# Altium PCB Drive-It_pcb.PcbDoc
Units mil, origin at the board's own origin, x right, y up, seen from the top; angles counter-clockwise.
Board outline 19800 x 8970 mil, 2 copper layers (Top Layer, Bottom Layer); 25 components, 36 nets, 120 pads, 0 vias.
Unrouted connection lines stored in the file: 64.
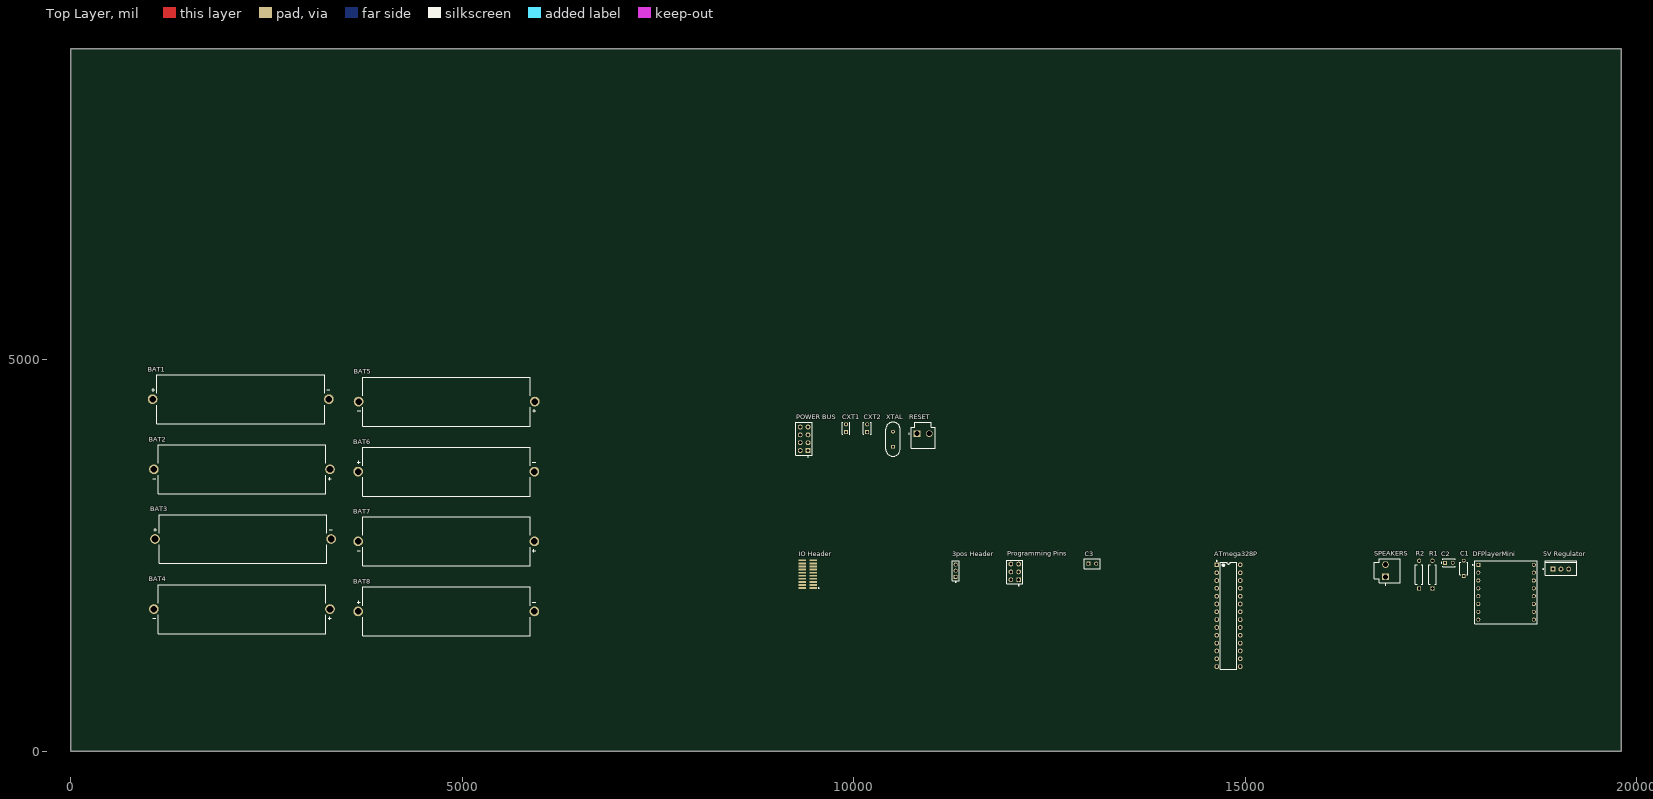
[diagram p0: Top Layer view]
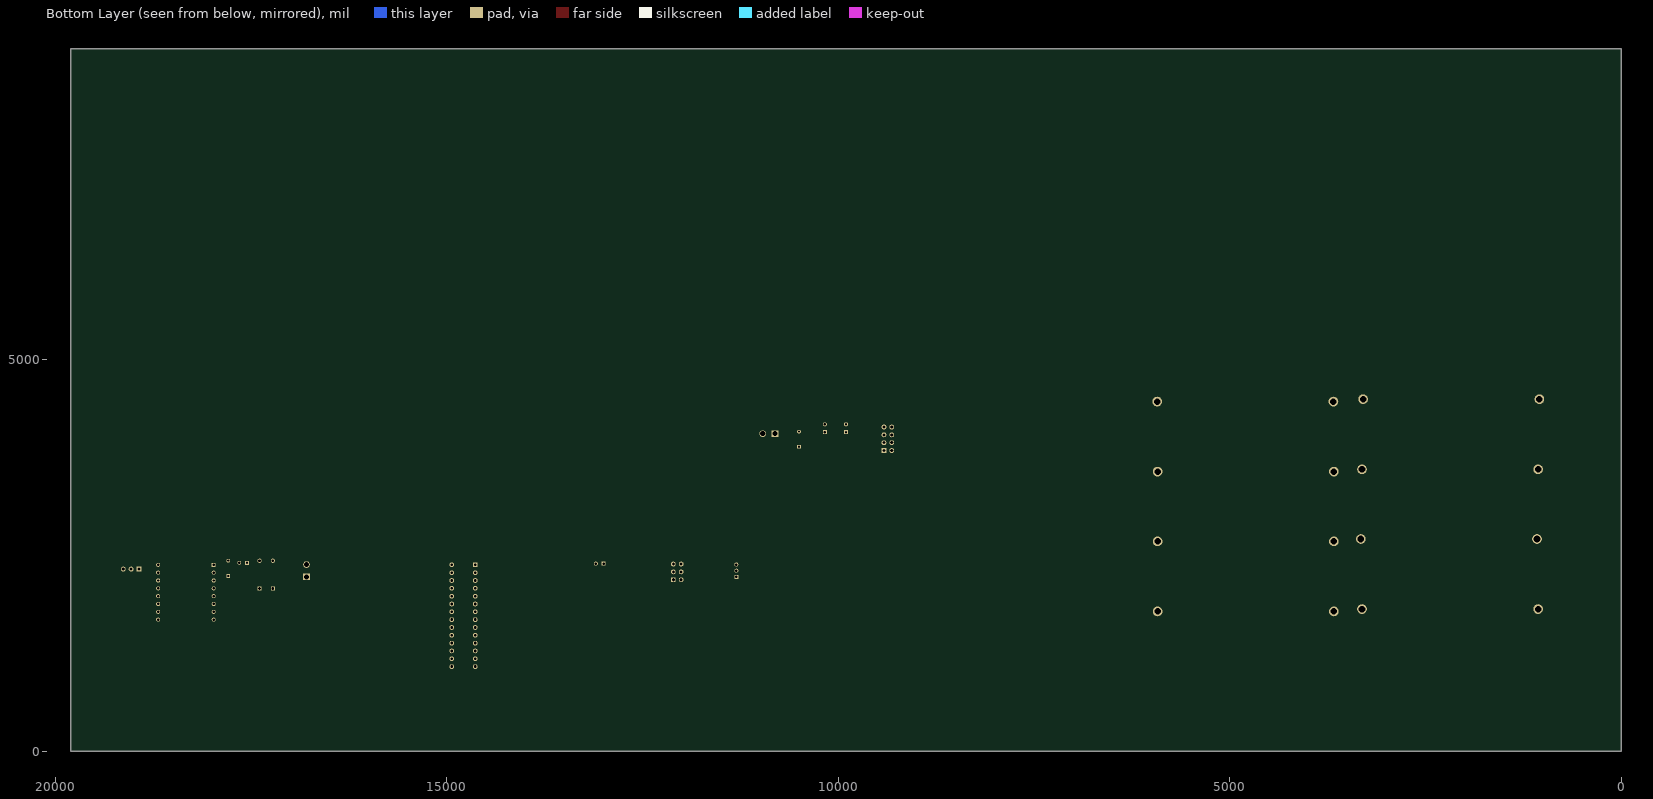
[diagram p1: Bottom Layer view, seen from below]

## Layer stack, top to bottom
Top Solder: solder mask 0.4, Solder Resist, Dk 3.5
Top Layer: signal copper 1.4
Dielectric 1: dielectric 12.6, FR-4, Dk 4.8
Bottom Layer: signal copper 1.4
Bottom Solder: solder mask 0.4, Solder Resist, Dk 3.5

## Board outline
0,0 19800,0 19800,8970 0,8970

## Design rules (kind name [scope] priority, off if disabled: settings)
Clearance [All] p1: gap=10 ignorepadtopadclearanceinfootprint=FALSE except(0: Arc-Hole Track-Hole SMDPad-Hole THPad-Hole Via-Hole Fill-Hole Poly-Hole Region-Hole Text-Hole)
PolygonConnect [All] p1: connectstyle=Relief reliefconductorwidth=10 reliefentries=4 polygonreliefangle="90 Angle" airgapwidth=10
RoutingVias [All] p1: holewidth=28 width=50 viastyle="Through Hole" minholewidth=28 minwidth=50 maxholewidth=28 maxwidth=50
SolderMaskExpansion [All] p1: expansion=4 istentingtop=FALSE
Width [All] p1: maxlimit=10 minlimit=10 preferedwidth=10
30 further rules are at their usual default settings.

## Components (designator, comment, footprint, x,y, rotation, side; value= is the part's Value field where it differs from the comment)
"3pos Header" "" FP-NRPN031PAEN-RC-MFG 11300,2305 r90 top
"5V Regulator" "LM7805" FAIR-TO-220-3 19030,2325 r90 top
ATmega328P "" ATML-28P3 14785,1730 r0 top
BAT1 "" BAT_2222 2170,4495 r0 top
BAT2 "" BAT_2222 2185,3600 r180 top
BAT3 "" BAT_2222 2200,2710 r0 top
BAT4 "" BAT_2222 2185,1815 r180 top
BAT5 "" BAT_2222 4800,4465 r180 top
BAT6 "" BAT_2222 4795,3570 r0 top
BAT7 "" BAT_2222 4795,2680 r180 top
BAT8 "" BAT_2222 4795,1785 r0 top
C1 "0.22uF" FP-RCE1K1-2_5-MFG 17790,2335 r90 top
C2 "0.1uF" VISH-K104K15X7RF5TL2 17600,2405 r0 top
C3 "C320C104K5R5TA" CAPR51-254-508X318X736 13045,2395 r0 top value=100nF
CXT1 "22pF" KEMT-C315-THT-2 9900,4125 r90 top
CXT2 "22pF" KEMT-C315-THT-2 10170,4125 r90 top
DFPlayerMini "" MODULE_DFR0299 18330,2030 r0 top
"IO Header" "" SMTC-MW-10-03-G-D-245-065-P_V 9410,2260 r90 top
"POWER BUS" "POWER BUS" FP-M20-9980446-MFG 9365,3990 r90 top
"Programming Pins" "" SMTC-TSW-103-07-G-D_V 12055,2290 r90 top
R1 "MFR-25FBF52-1K" RESA60-630X240 17390,2255 r90 top value=680
R2 "MFR-25FBF52-1K" RESA60-630X240 17220,2255 r90 top value=1k
RESET "" JST-B2P-VH(LF)(SN)_V 10885,4000 r0 top
SPEAKERS "" JST-B2P-VH(LF)(SN)_V 16845,2305 r90 top
XTAL "16MHz" JPY-49S-18PF 10500,3985 r90 top

## Footprints (in the part's own frame and the unit in brackets; to place one, negate y for a bottom-side part, rotate by r counter-clockwise, add the part's x,y. Pads: shape width x height; smd on the part's side, far side on the other; paste and mask are expansions set on the pad)
ATML-28P3 [mm] "DIP, 28-Leads, Body 34.8x7.2mm, Pitch 2.54mm"
  rect 1.5x1.5 hole 0.9: 1(-3.81,16.51)
  round 1.5 hole 0.9: 2(-3.81,13.97) 3(-3.81,11.43) 4(-3.81,8.89) 5(-3.81,6.35) 6(-3.81,3.81) 7(-3.81,1.27) 8(-3.81,-1.27) 9(-3.81,-3.81) 10(-3.81,-6.35) 11(-3.81,-8.89) 12(-3.81,-11.43) 13(-3.81,-13.97) 14(-3.81,-16.51) 15(3.81,-16.51) 16(3.81,-13.97) 17(3.81,-11.43) 18(3.81,-8.89) 19(3.81,-6.35) 20(3.81,-3.81) 21(3.81,-1.27) 22(3.81,1.27) 23(3.81,3.81) 24(3.81,6.35) 25(3.81,8.89) 26(3.81,11.43) 27(3.81,13.97) 28(3.81,16.51)
  silkscreen extent -3.93,-17.4 2.65,17.93, body extent -3.95,-17.4 3.95,17.4, height 4.58
BAT_2222 [mm]
  round 3.146 hole 2.13: N(28.575,0) P(-28.575,0)
  silkscreen extent -28.94,-7.94 28.94,7.94
CAPR51-254-508X318X736 [mm] "THD, 2-Leads, Body 5.08x3.18mm"
  rect 1.3x1.3 hole 0.8: 1(-1.27,0)
  round 1.3 hole 0.8: 2(1.27,0)
  silkscreen extent -2.54,-1.59 2.54,1.59, body extent -2.54,-1.59 2.54,1.59, height 7.36
FAIR-TO-220-3 [mm] "FM, 3-Leads, Body 10.2x4.7mm, Pitch 2.54mm"
  rect 1.6x1.6 hole 1: 1(0,2.54)
  round 1.6 hole 1: 2(0,0) 3(0,-2.54)
  silkscreen extent -2.04,-5.1 2.66,5.87, body extent -2.04,-5.1 2.66,5.1, height 18.95
FP-M20-9980446-MFG [mm]
  rect 1.57x1.57 hole 1.02 paste-2539.97 mask+0: 1(-3.81,-1.27)
  round 1.57 hole 1.02 paste-2539.97 mask+0: 2(-3.81,1.27) 3(-1.27,-1.27) 4(-1.27,1.27) 5(1.27,-1.27) 6(1.27,1.27) 7(3.81,-1.27) 8(3.81,1.27)
  silkscreen extent -6.05,-2.64 5.33,2.64, body extent -5.43,-2.74 5.43,2.74, height 0.25
FP-NRPN031PAEN-RC-MFG [mm]
  rect 1.3x1.3 hole 0.8 paste-2539.97 mask+0: 1(-2,0)
  round 1.3 hole 0.8 paste-2539.97 mask+0: 2(0,0) 3(2,0)
  silkscreen extent -3.8,-1.1 3.25,1.1, body extent -3.35,-1.2 3.35,1.2, height 0.25
FP-RCE1K1-2_5-MFG [mm]
  rect 1.2x1.2 hole 0.7 paste-2539.97 mask+0: 1(-2.5,0)
  round 1.2 hole 0.7 paste-2539.97 mask+0: 2(2.5,0)
  silkscreen extent -2,-1.25 2,1.25, body extent -3.2,-1.35 3.2,1.35, height 0.25
JPY-49S-18PF [mm] "THD, 2-Leads, Body 11.05x4.65mm, Pitch 4.88mm"
  rect 1.2x1.2 hole 0.7: 1(-2.44,0)
  round 1.2 hole 0.7: 2(2.44,0)
  silkscreen extent -5.53,-2.32 5.53,2.32, body extent -5.52,-2.32 5.53,2.33, height 3.5
JST-B2P-VH(LF)(SN)_V [mm] "THD, 2-Leads, Body 8.5x7.86mm, Pitch 3.96mm"
  rect 2.15x2.15 hole 1.65: 1(-1.98,1.4)
  round 2.15 hole 1.65: 2(1.98,1.4)
  silkscreen extent -4.7,-3.4 3.93,5.1, body extent -3.93,-3.2 3.93,5.3, height 10.9
KEMT-C315-THT-2 [mm] "THD, 2-Leads, Body 3.81x2.54mm"
  rect 1.3x1.3 hole 0.8: 1(-1.27,0)
  round 1.3 hole 0.8: 2(1.27,0)
  silkscreen extent -1.91,-1.27 1.91,1.27, body extent -1.91,-1.27 1.91,1.27, height 4.66
MODULE_DFR0299 [mil]
  rect 51.5x51.5 hole 31.5: 1(-355,350)
  round 51.5 hole 31.5: 2(-355,250) 3(-355,150) 4(-355,50) 5(-355,-50) 6(-355,-150) 7(-355,-250) 8(-355,-350) 9(355,-350) 10(355,-250) 11(355,-150) 12(355,-50) 13(355,50) 14(355,150) 15(355,250) 16(355,350)
  silkscreen extent -429,-400 400,400
RESA60-630X240 [mm] "Axial Resistor, 2-Leads, Dia 2.4mm, Body Length 6.3mm"
  rect 1.35x1.35 hole 0.85: 1(-4.5,0)
  round 1.35 hole 0.85: 2(4.5,0)
  silkscreen extent -3.15,-1.2 3.15,1.2, body extent -4.77,-1.19 4.77,1.2, height 2.4
SMTC-MW-10-03-G-D-245-065-P_V [mm] "CONN, 20-Leads, Body 3.18x10mm, Pitch 1mm"
  rect 0.56x2.41 smd: 1(-4.5,-1.78) 2(-4.5,1.78) 3(-3.5,-1.78) 4(-3.5,1.78) 5(-2.5,-1.78) 6(-2.5,1.78) 7(-1.5,-1.78) 8(-1.5,1.78) 9(-0.5,-1.78) 10(-0.5,1.78) 11(0.5,-1.78) 12(0.5,1.78) 13(1.5,-1.78) 14(1.5,1.78) 15(2.5,-1.78) 16(2.5,1.78) 17(3.5,-1.78) 18(3.5,1.78) 19(4.5,-1.78) 20(4.5,1.78)
  silkscreen extent -4.63,-3.69 -4.37,-3.44, body extent -5,-2.6 5,2.6, height 9.39
SMTC-TSW-103-07-G-D_V [mm] "THD, 6-Leads, Body 7.62x5.08mm, Pitch 2.54mm"
  rect 1.55x1.55 hole 1.02: 1(-2.54,-1.27)
  round 1.55 hole 1.02: 2(-2.54,1.27) 3(0,-1.27) 4(0,1.27) 5(2.54,-1.27) 6(2.54,1.27)
  silkscreen extent -4.58,-2.54 3.81,2.54, body extent -3.81,-2.54 3.81,2.54, height 8.38
VISH-K104K15X7RF5TL2 [mm] "THD, 2-Leads, Body 4x2.6mm"
  rect 1.25x1.25 hole 0.75: 1(-1.25,0)
  round 1.25 hole 0.75: 2(1.25,0)
  silkscreen extent -2.55,-1.3 2,1.3, body extent -2,-1.3 2,1.3, height 5.6

## Part data
"3pos Header": library part CMP-25680-000021-1, "CONN HEADER VERT 3POS 2MM", Current Rating=2A, Manufacturer=Sullins, Manufacturer Part Number=NRPN031PAEN-RC, Package=0, Temperature="-40°C to +105°C", Temperature Range High=+105°C, Temperature Range Low=-40°C, Voltage Rating=150V, Automotive=No, Category=Conn, ComponentLink2Description=Datasheet, ComponentLink2URL=https://drawings-pdf.s3.amazonaws.com/10531.pdf, Conn Gender=Male, Conn Orientation=Straight, Contact Material=Gold,Nickel, Device Class L1=Connectors, Device Class L2="Headers and Wire Housings", Device Class L3=unset, Digikey Description="CONN HEADER VERT 3POS 2MM", Height=6mm, Lead Free=Yes, Number Of Contacts=3, Number Of Rows=1, Octopart=https://octopart.com/nrpn031paen-rc-sullins-12817732, Pitch=2mm, RoHS=TRUE
"5V Regulator": library part CMP-2000-04938-1, "Positive Voltage Regulator, 5 V, 1 A, -40 to 125 degC, 3-Pin TO-220, RoHS, Tube", Manufacturer=FairchildSemiconductor, Maximum Input Voltage=35V, Maximum Output Current=2.2(Typ)A, Maximum Quiescent Current=8mA, Operating Temperature=-40to125degC, Output Voltage=5V, Package=3TO-220AB, Package Description="3-Pin Through Hole Device, Body 10 x 4.5 mm, Pitch 2.54 mm", Package Reference=TO-220, Typical Dropout Voltage @ Current=2@1AV, Accuracy=±4%, Category=LinearRegulator, Datasheet URL=https://datasheet.ciiva.com/26904/lm7805ct-26904988.pdf, Datasheet Version=Aug-12, Line Regulation=100mV, Load Regulation=100mV, Manufacturer URL=https://www.fairchildsemi.com/, Mounting=ThroughHole, Number of Outputs=1, Output Type=Fixed, Package URL=https://www.fairchildsemi.com/package-drawings/TO/TO220B03.pdf, Packaging=Rail/Tube, Polarity=Positive, Rad Hard=No, Type=Linear
ATmega328P: library part CMP-020-00004-3, "8-Bit Microcontroller with 32 KBytes In-System Programmable Flash, 23 I/Os, -40 to 85 degC, 28-Pin PDIP (28P3), RoHS, Tube", Case/Package=DIP, Manufacturer=Atmel, Max Clock Frequency=20MHz, Max Operating Temperature=85°C, Max Supply Voltage=5.5V, Min Operating Temperature=-40°C, Min Supply Voltage=1.8V, Package Description="28-Pin Plastic Dual Inline Package, Body 34.671 x 7.3025 mm, Pitch 2.54 mm", Package Quantity=14, Package Reference=28P3, Package Version="Rev. B, 09/2001", Datasheet URL=http://www.atmel.com/images/Atmel-8271-8-bit-AVR-Microcontroller-ATmega48A-48PA-88A-88PA-168A-168PA-328-328P_datasheet_Complete.pdf, Datasheet Version="Rev. 8271J, 11/2015", Density=32KB, Ethernet Channels=0, I/Os=23, Interface=USART, Manufacturer URL=http://www.atmel.com/, Mounting Technology=TH, Package URL=http://www.atmel.com/images/Atmel-8271-8-bit-AVR-Microcontroller-ATmega48A-48PA-88A-88PA-168A-168PA-328-328P_datasheet_Complete.pdf, Packaging=Rail/Tube, Pins=28, RAM Size=2KB, RoHS Compliant=True
BAT1 BAT2 BAT3 BAT4 BAT5 BAT6 BAT7 BAT8: library part CMP-018-000001-4, "Keystone Electronics single AA battery connector", Package=None, Availability=Unavailable, Component Type=Standard, Connector Type="PC Pin", Design Item ID=2222, Mounting Technology=through-hole, MP=2222, Pin Count=2, Price=None, Source=2222.SchLib
C1: library part CMP-06035-033138-1, "Cap Ceramic Monolithic 220nF 50V 10% Thru-Hole Bulk", Capacitance=220nF, Case/Package=Radial, Dielectric=X7R, Max Operating Temperature=125°C, Min Operating Temperature=-55°C, Package Quantity=500, Ratings=AEC-Q200, Resistor Type=Ceramic, Tolerance=10%, Voltage Rating=50V, Height=3.5mm, Height - Seated (Max)=0.138inch, Lead Diameter=0.5mm, Lead Pitch=0.197inch, Lead/Base Style="Formed Leads", Length=0.157inch, Mount="Through Hole", Packaging=Bulk, Termination=Radial, Voltage Rating (DC)=50V, Width=0.098inch
C2: library part CMP-2000-06508-1, "Ceramic Capacitor, 100 nF, +/- 10%, 50 V, -55 to 125 degC, 2-Pin THD, RoHS, Tape and Reel", Capacitance=0.1µF, Manufacturer=Vishay, Operating Temperature=-55°C~125°C, Package / Case=Radial, Package Description="2-Pin Through Hole Device, Body 4 x 2.6 mm", Package Reference=K104K15X7RF5TL2, Ratings=-, Standard Package=1, Temperature Coefficient=X7R, Tolerance=±10%, Voltage - Rated=50V, Applications=GeneralPurpose, Catalog Drawings=Mono-KapSide2-15_5.58Mono-KapSide1_15, Category=Capacitors, Datasheet URL=http://www.vishay.com/docs/45171/kseries.pdf, Datasheet Version=08/2013, Family=CeramicCapacitors, Features=-, Height - Seated (Max)="0.220\"(5.58mm)", Lead Spacing="0.098\"(2.50mm)", Lead Style=Straight, Manufacturer URL=http://www.vishay.com/, Mounting Technology=ThroughHole, Mounting Type=ThroughHole, Online Catalog=Mono-Kap™Series, Other Names=BC1084CT, Packaging=CutTape(CT), Series=Mono-Kap™K, Size / Dimension="0.157\"Lx0.098\"W(4.00mmx2.50mm)", Thickness (Max)=-
C3: library part CMP-001-00088-1, "Ceramic Capacitor, Multilayer, Ceramic, 50V, 10% +Tol, 10% -Tol, X7R, 15% TC, 0.1uF, Through Hole Mount", Capacitor Type=Ceramic, Max Operating Temperature=125°C, Min Operating Temperature=-55°C, Tolerance=10%, Voltage Rating=50V, Mounting Technology="Through Hole", Pins=2, RoHS Compliant=Yes
CXT1 CXT2: library part CMP-1664-00008-1, "Capacitor, Ceramic, 22 pF, +/-10 %, 100 V, -55 to 125 degC, 2-Pin THD, RoHS, Bulk", Case\Package=TO-220, Max Input Voltage="40 V", Max Operating Temperature="125 degC", Max Ouput Current="1.5 A", Min Input Voltage="4.2 V", Min Operating Temperature="0 degC", Output Voltage="1.2 V", Package Quantity=50, ComponentLink1Description="Manufacturer URL", ComponentLink1URL=http://www.kemet.com/, ComponentLink2Description=Datasheet, ComponentLink2URL=http://capacitoredge.kemet.com/capedge2/DataSheet/Datasheet-C315C220K1G5TA.pdf?pn=C315C220K1G5TA{BULK}, DatasheetVersion=Aug-16, Height="9.28 mm", Length="10.28 mm", Mount="Through Hole", Output Current="1.5 A", Outputs=1, PackageDescription="2-Pin Through Hole Device, Body 3.81 x 2.54 mm", PackageReference=C315-THT-2, Packaging=Rail/Tube, Pins=3, Radiation Hardening=No, REACH SVHC="No SVHC", RoHSCompliant=true, Weight="0.08113 oz", Width="4.82 mm"
DFPlayerMini: library part DFR0299, "Dfplayer - a Mini Mp3 Player", Package=None, Availability=Unavailable, MP=DFR0299, Price=None
"IO Header": library part CMP-002-00046-2, "Flexible Micro Board Stacker, Pitch 1 mm, 2 x 10 Position, Height 9.4 mm, -55 to 125 degC, RoHS, Tape and Reel", Case/Package=MW-10-03-G-D-245-065-P, Manufacturer=Samtec, Max Operating Temperature=125°C, Min Operating Temperature=-55°C, Package Description="Flexible Micro Board Stacker, Pitch 1 mm, 2 x 10 Position, Height 9.4 mm", Connector Type=Header, Datasheet URL=http://suddendocs.samtec.com/prints/mw-xx-03-x-d-xxx-xxx-xx-mkt.pdf, Datasheet Version=34759, Gender=Male, Manufacturer URL=https://www.samtec.com/, Mounting Technology=SM, Package Reference=MW-10-03-G-D-245-065-P, Packaging=TapeandReel, Pins=20, RoHS Compliant=True
"POWER BUS": library part CMP-15831-000088-1, "CONN HEADER VERT 8POS 2.54MM", Color=Black, Contact Resistance=30mR, Current Rating=3A, Flammability Rating="UL94 V-0", Insulation Resistance=10GR, Max Operating Temperature=105°C, Min Operating Temperature=-40°C, Package Quantity=1000, Connector Type="Male Pin", Contact Finish - Mating=TIN, Contact Material=Brass, Contact Mating Length=0.24inch, Contact Plating=Tin, Contact Shape=Square, Contact Type="Male Pin", Depth=5.08mm, Fastening Type=Pull, Gender=Male, Housing Color=Black, Housing Material=Nylon, Insulation Color=Black, Insulation Material=Nylon, Length=10.16mm, Mated Stacking Heights=16.54mm, Max Current Rating=3A, Mount="Through Hole", Number Of Contacts=8, Number of Positions=8, Number Of Rows=2, Orientation=Straight, Packaging=Bulk, Pitch=2.54mm, Radiation Hardening=No, REACH SVHC="No SVHC", RoHS Compliant=Yes, Row Spacing=0.1inch, Series=M20, Termination=Solder
"Programming Pins": library part CMP-2000-07329-1, "Through Hole Header, Pitch 2.54 mm, 2 x 3 Position, Height 8.58 mm, Tail Length 2.54 mm, -55 to 125 degC, RoHS, Bulk", Color=Black, Manufacturer=Samtec-Inc., Package Description="Through Hole Header, Pitch 2.54 mm, 2 x 3 Position, Height 8.58 mm, Tail Length 2.54 mm", Package Reference=TSW-103-07-G-D, Category=Connectors,Interconnects, Connector Type=Header,Unshrouded, Contact Finish=Gold, Contact Finish Thickness=10µin(0.25µm), Contact Mating Length="0.230\"(5.84mm)", Contact Type=MalePin, Datasheet URL=http://suddendocs.samtec.com/catalog_english/tsw_th.pdf, Datasheet Version=12/2015, Family=RectangularConnectors-Headers,MalePins, Fastening Type=-, Features=-, Manufacturer URL=http://www.samtec.com/, Mounting Technology=ThroughHole, Mounting Type=ThroughHole, Number of Positions=6, Number of Positions Loaded=All, Number Of Rows=2, Package URL=http://suddendocs.samtec.com/prints/tsw-xxx-xx-xxx-x-xx-xxx-mkt.pdf, Packaging=Bulk, Pitch="0.100\"(2.54mm)", Row Spacing="0.100\"(2.54mm)", Series=TSW, Termination=Solder
R1 R2: library part CMP-009-00048-4, "Axial Resistor, 1 KOhm, +/- 1%, 250 mW, -55 to 155 degC, 2-Pin THD, RoHS, Bulk", Case/Package=Axial, Manufacturer=Yageo, Max Operating Temperature=155°C, Min Operating Temperature=-55°C, Package Description="2-Pin Axial Lead, Dia 2.4 mm, Body Length 6.3 mm", Package Quantity=200, Package Reference=MFR-25, Power=250mW, Tolerance=1%, Voltage Rating=250V, Composition=CarbonFilm, Datasheet URL=http://www.yageo.com/documents/recent/Yageo%20LR_MFR_2013.pdf, Datasheet Version=Apr-13, Manufacturer URL=http://www.yageo.com/, Mounting Technology=TH, Packaging=Bulk, RoHS Compliant=True
RESET SPEAKERS: library part CMP-002-00025-2, "Male Header, Pitch 3.96 mm, 1 x 2 Position, Height 10.9 mm, Tail Length 3.7 mm, -25 to 85 degC, RoHS, Bulk", Case/Package=B2P-VH(LF)(SN), Manufacturer=JST, Max Operating Temperature=85°C, Min Operating Temperature=-25°C, Package Description="Male Header, Pitch 3.96 mm, 1 x 2 Position, Height 10.9 mm, Tail Length 3.7 mm", Connector Type=Header, Datasheet URL=http://www.jst-mfg.com/product/pdf/eng/eVH.pdf, Datasheet Version=May-16, Gender=Male, Manufacturer URL=http://www.jst.com/home2.html, Mounting Technology=TH, Package Reference=B2P-VH(LF)(SN), RoHS Compliant=Unknown
XTAL: library part CMP-003-00000-2, "Crystal, 16 MHz, +/-20 ppm, 18 pF, -20 to 70 degC, 2-Pin THD, RoHS", Case/Package=49S-18PF, Manufacturer="Shenzhen Jingpengyuan", Package Description="2-Pin Through Hole Device, Body 11.05 x 4.65 mm, Pitch 4.88 mm", Datasheet URL=http://datasheet.octopart.com/49S-18PF-Xinhunjing-datasheet-30677139.pdf, Datasheet Version=Aug-14, Frequency=16MHz, Manufacturer URL=http://www.chjiahui.com/, Mounting Technology=TH, Package Reference=49S-18PF, RoHS Compliant=Unknown

## Nets (pads, with @x,y where several pads share a name; then routed paths per layer and width w, separated by ;. In a path a pad name is that pad's centre, name@x,y a point inside that pad or via, vN(x,y) a via of type N, cw(c..) or ccw(c..) an arc to the next point about the centre after c; other vN are vias at no path point)
GND: "5V Regulator.2" "POWER BUS.5" "POWER BUS.7" "Programming Pins.5" ATmega328P.8 ATmega328P.22 BAT4.N BAT8.N C1.2 C2.1 C3.1 DFPlayerMini.7 DFPlayerMini.10 R2.1
"Net3pos Header_2": "3pos Header.2" ATmega328P.20
"Net5V Regulator_1": "5V Regulator.1" BAT1.P BAT5.P C1.1
"Net5V Regulator_3": "5V Regulator.3" "POWER BUS.1" "POWER BUS.3" "Programming Pins.1" ATmega328P.7 C2.2 C3.2 DFPlayerMini.1
NetATmega328P_1: "Programming Pins.6" ATmega328P.1 RESET.1 RESET.2
NetATmega328P_2: "IO Header.1" ATmega328P.2 DFPlayerMini.3
NetATmega328P_3: "IO Header.3" ATmega328P.3 R1.2 R2.2
NetATmega328P_4: "IO Header.5" ATmega328P.4
NetATmega328P_5: "IO Header.7" ATmega328P.5
NetATmega328P_6: "IO Header.9" ATmega328P.6
NetATmega328P_9: ATmega328P.9 XTAL.1
NetATmega328P_10: ATmega328P.10 XTAL.2
NetATmega328P_11: "IO Header.11" ATmega328P.11
NetATmega328P_12: "IO Header.13" ATmega328P.12
NetATmega328P_13: "IO Header.15" ATmega328P.13
NetATmega328P_14: "IO Header.17" ATmega328P.14
NetATmega328P_15: "IO Header.19" ATmega328P.15
NetATmega328P_16: "IO Header.2" ATmega328P.16
NetATmega328P_17: "IO Header.4" "Programming Pins.3" ATmega328P.17
NetATmega328P_18: "IO Header.6" "Programming Pins.2" ATmega328P.18
NetATmega328P_19: "IO Header.8" "Programming Pins.4" ATmega328P.19
NetATmega328P_23: "IO Header.10" ATmega328P.23
NetATmega328P_24: "IO Header.12" ATmega328P.24
NetATmega328P_25: "IO Header.14" ATmega328P.25
NetATmega328P_26: "IO Header.16" ATmega328P.26
NetATmega328P_27: "IO Header.18" ATmega328P.27
NetATmega328P_28: "IO Header.20" ATmega328P.28
NetBAT1_N: BAT1.N BAT2.P
NetBAT2_N: BAT2.N BAT3.P
NetBAT3_N: BAT3.N BAT4.P
NetBAT5_N: BAT5.N BAT6.P
NetBAT6_N: BAT6.N BAT7.P
NetBAT7_N: BAT7.N BAT8.P
NetDFPlayerMini_2: DFPlayerMini.2 R1.1
NetDFPlayerMini_6: DFPlayerMini.6 SPEAKERS.2
NetDFPlayerMini_8: DFPlayerMini.8 SPEAKERS.1
pads on no net: "3pos Header.1" "3pos Header.3" "POWER BUS.2" "POWER BUS.4" "POWER BUS.6" "POWER BUS.8" ATmega328P.21 CXT1.1 CXT1.2 CXT2.1 CXT2.2 DFPlayerMini.4 DFPlayerMini.5 DFPlayerMini.9 DFPlayerMini.11 DFPlayerMini.12 DFPlayerMini.13 DFPlayerMini.14 DFPlayerMini.15 DFPlayerMini.16